# EAGLE board myschematic (EAGLE 4.15)
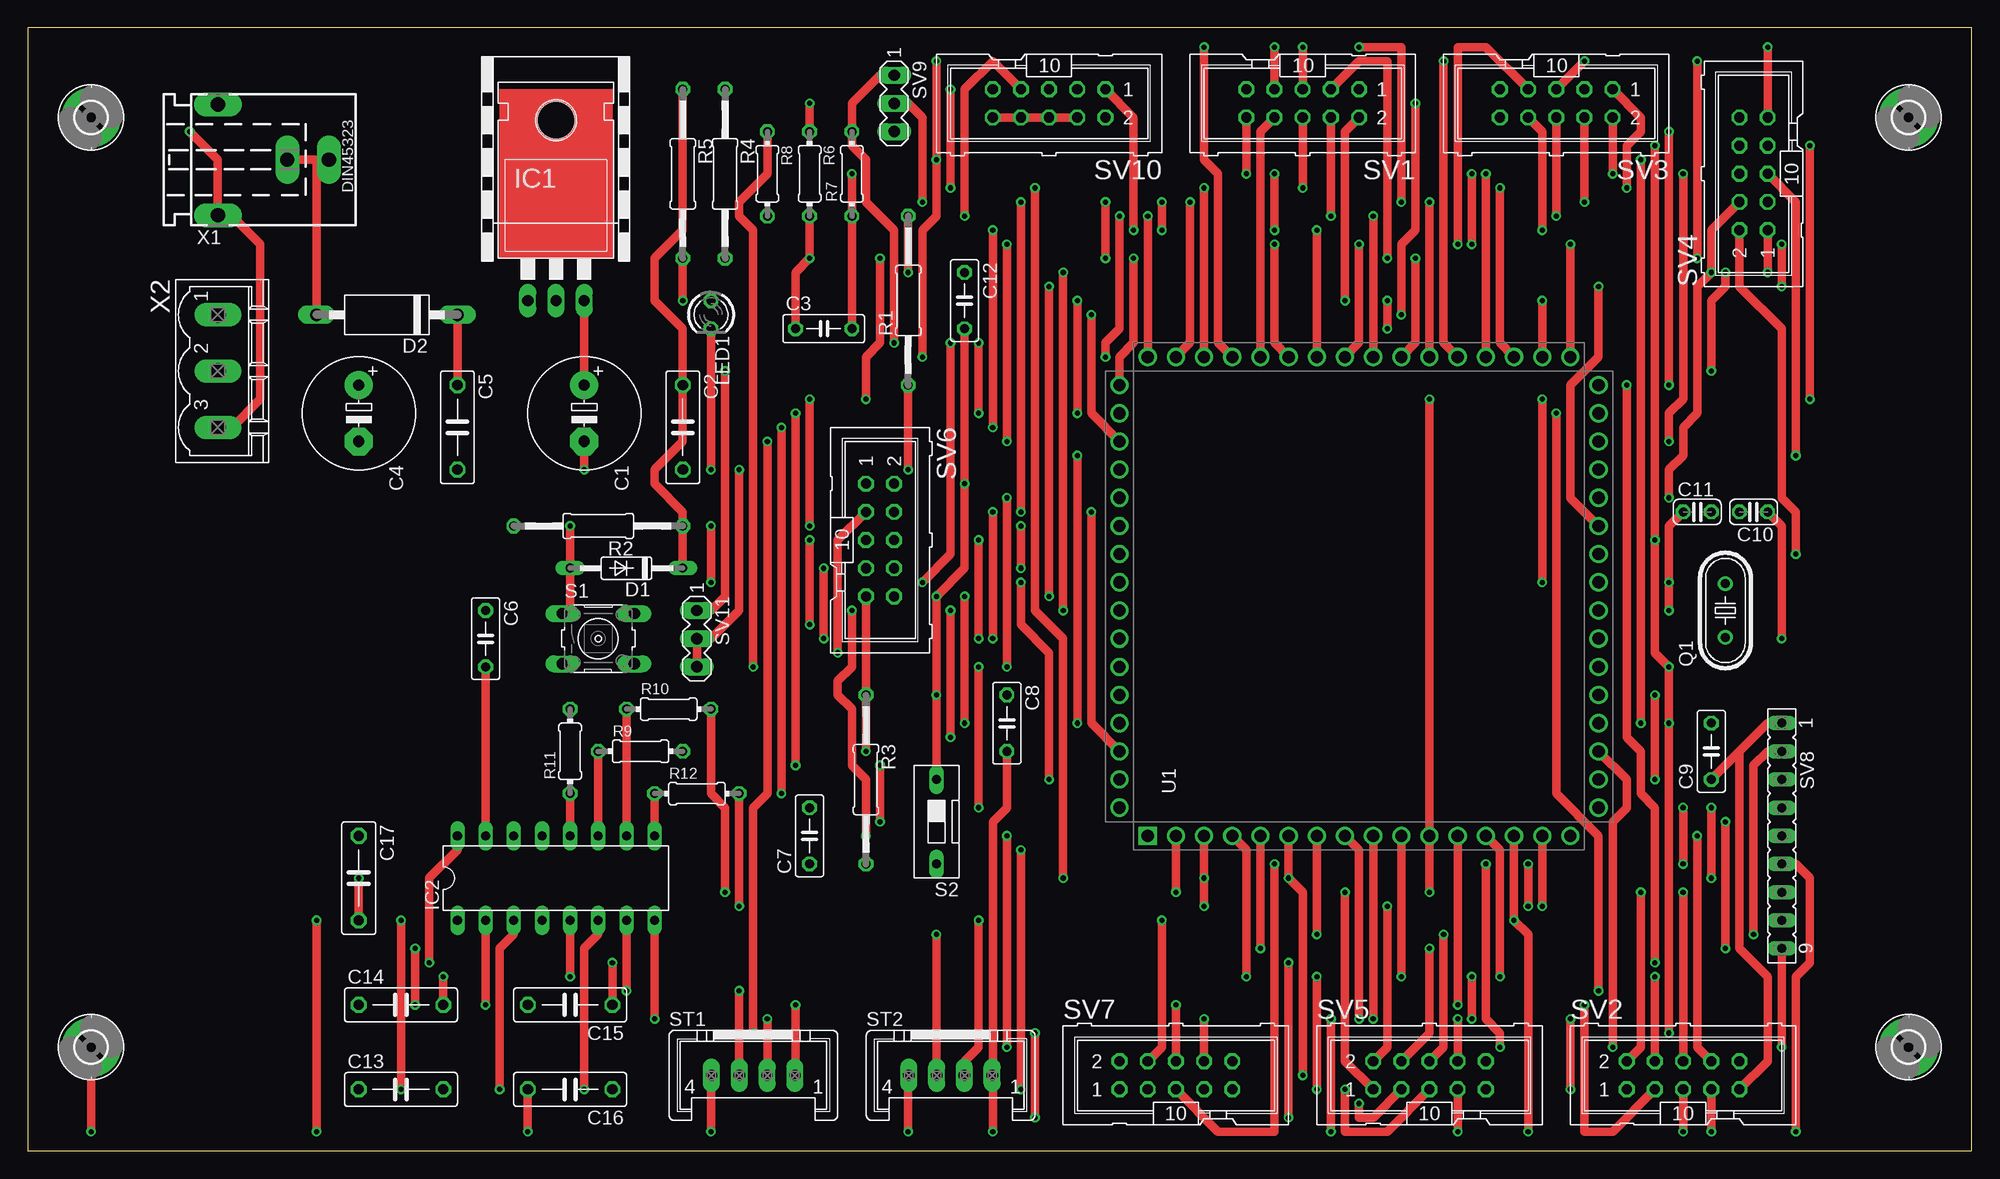
[diagram p0: board, top side]
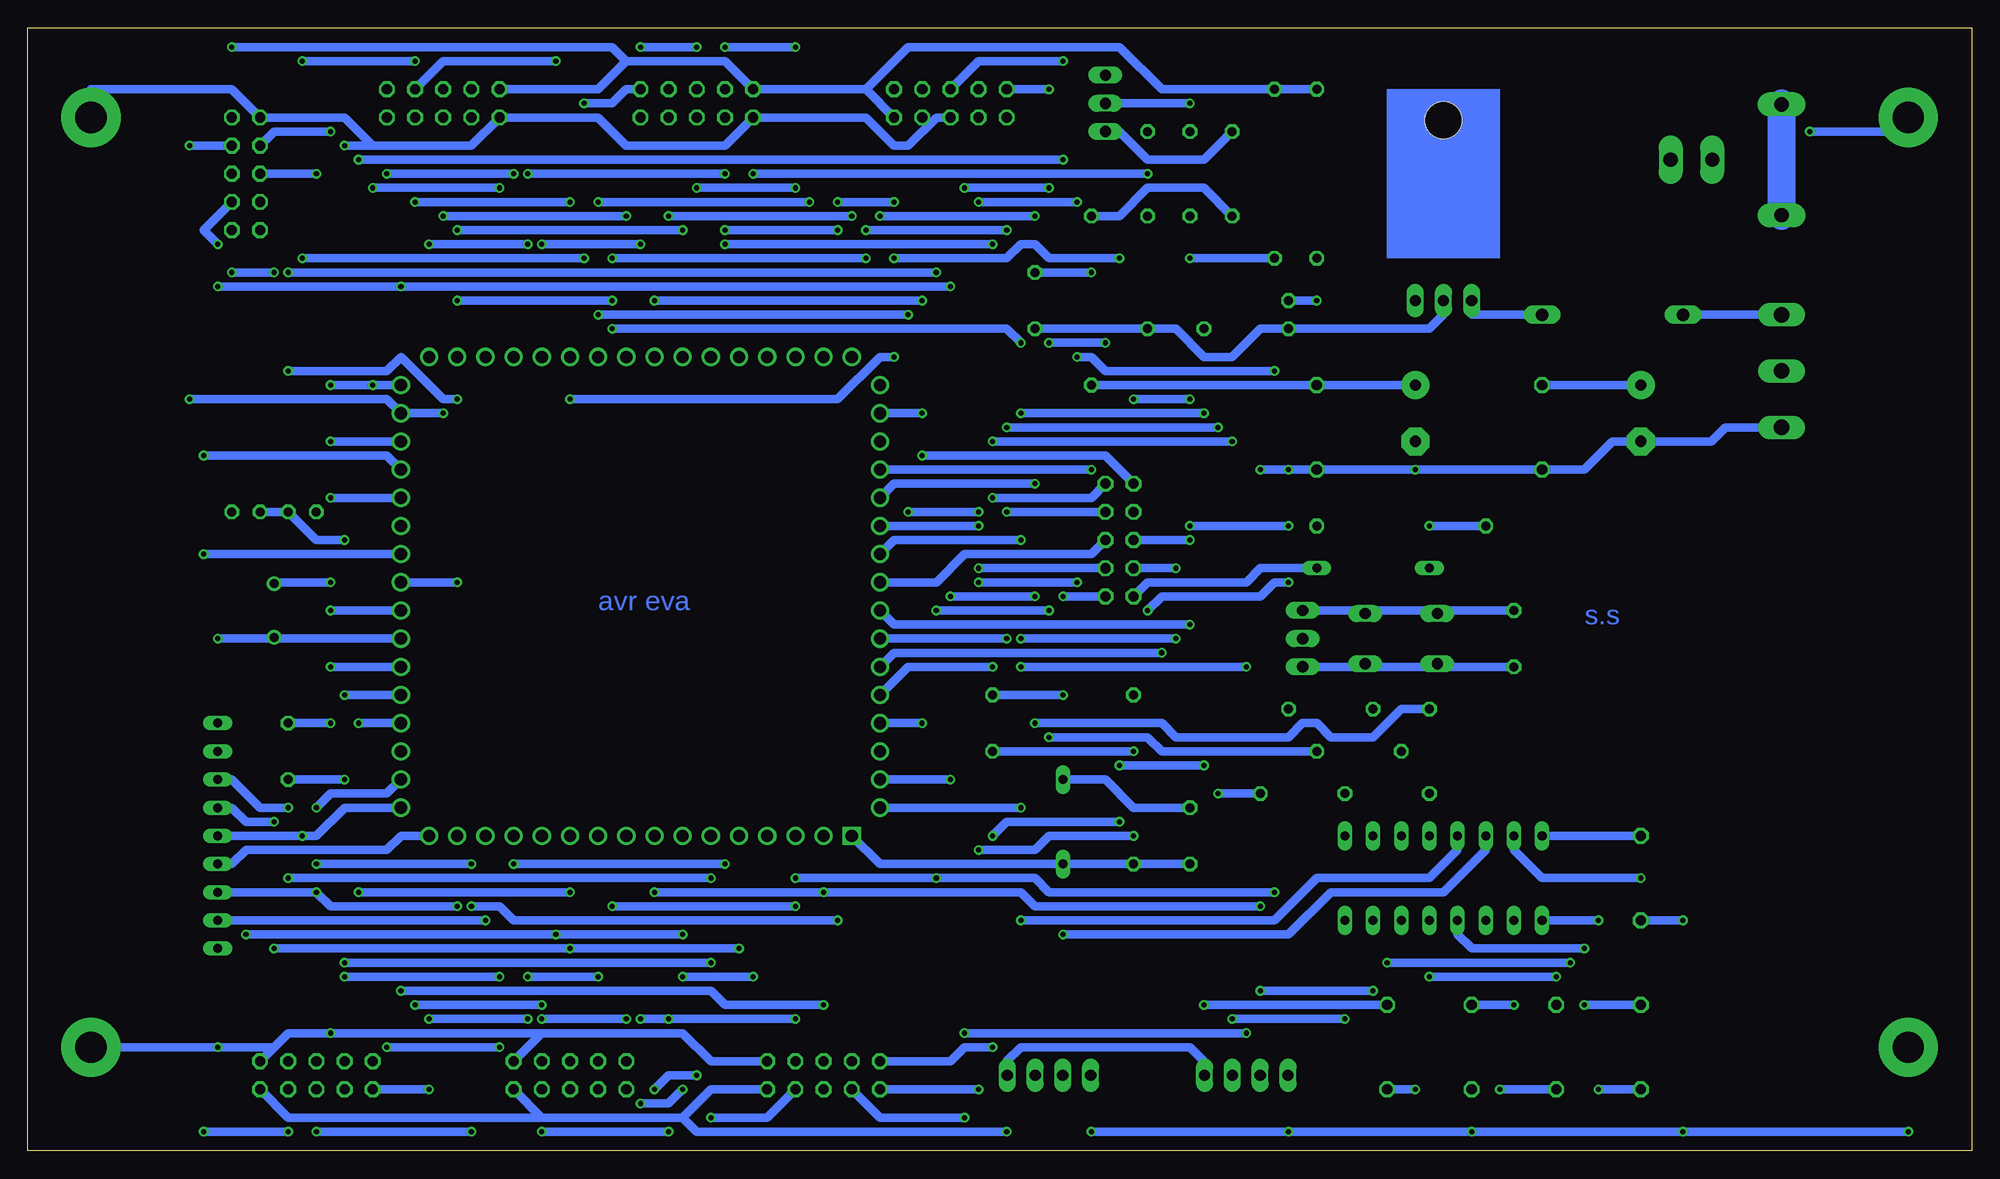
[diagram p1: board, bottom side, seen from below]

Size 175.24 x 101.27 mm. Coordinates in mm from the lower left corner, seen from the top.
Outline: 0,0 175.24,0 175.24,101.27 0,101.27 0,0
Copper layers (1*16): Top 0.035mm / dielectric 1.5mm / Bottom 0.035mm
Design rules "default": minimum track width 30mil, minimum drill 18mil, track to track 16mil, track to pad 16mil, pad to pad 16mil, via to via 16mil, smd to smd 8mil, copper to edge 20mil, drill to drill 8mil, minimum pad ring 10mil, minimum via ring 8mil, stop-mask expansion 1mil, vias tented up to drill 4mil, thermal gap 25mil
Net classes: 0 default: width 0.102 mm, drill 0.025 mm, clearance 0.025 mm
tRestrict: area 12.1,3 to 24.8,56.4; area 40,79.2 to 55.2,99.5; area 151.8,50 to 154.3,52.5; area 151.8,44.9 to 154.3,47.5; area 149.2,42.4 to 156.8,55.1; area 161.9,13.2 to 174.6,89.4; area 0.6,13.2 to 12.1,89.4; area 24.8,32.2 to 37.5,56.4
bRestrict: area 12.1,3 to 24.8,56.4; area 40,79.2 to 55.2,99.5; area 0.6,13.2 to 12.1,89.4; area 161.9,13.2 to 174.6,89.4; area 24.8,32.2 to 37.5,56.4
vRestrict: area 12.1,3 to 24.8,56.4; area 40,79.2 to 55.2,99.5; area 24.8,32.2 to 33.7,56.4

## Footprints (pad centres in the part's own frame; a part is rotated, then mirrored left to right if it is on the bottom)
E5-10,5 = drill 1.016 pad 2.54 round: + -2.54,0 | drill 1.016 pad 2.54 octagon: - 2.54,0
C075-032X103 = drill 0.914 octagon: 1 -3.81,0; 2 3.81,0
C050-025X075 = drill 0.813 octagon: 1 -2.54,0; 2 2.54,0
C025-024X044 = drill 0.813 octagon: 1 -1.27,0; 2 1.27,0
DO35-10 = drill 0.813 long: A 5.08,0; C -5.08,0
DO15-12 = drill 1.118 long: A 6.35,0; C -6.35,0
2,8-PAD = drill 2.8 pad 5.334 round: B2,8 0,0
78XXH = drill 1.016 long: GND 0,-5.08; IN -2.54,-5.08; OUT 2.54,-5.08 | hole 3.302: 0,11.176
DIL16 = drill 0.813 long: 1 -8.89,-3.81; 2 -6.35,-3.81; 3 -3.81,-3.81; 4 -1.27,-3.81; 5 1.27,-3.81; 6 3.81,-3.81; 7 6.35,-3.81; 8 8.89,-3.81; 9 8.89,3.81; 10 6.35,3.81; 11 3.81,3.81; 12 1.27,3.81; 13 -1.27,3.81; 14 -3.81,3.81; 15 -6.35,3.81; 16 -8.89,3.81
LED3MM = drill 0.813 octagon: A -1.27,0; K 1.27,0
HC49U-V = drill 0.813 round: 1 -2.413,0; 2 2.413,0
0207/15 = drill 0.813 octagon: 1 -7.62,0; 2 7.62,0
0204/7 = drill 0.813 octagon: 1 -3.81,0; 2 3.81,0
B3F-10XX = drill 1.016 long: 1 -3.251,2.261; 2 3.251,2.261; 3 -3.251,-2.261; 4 3.251,-2.261
DS-01 = drill 0.813 long: 1 0,-3.81; 2 0,3.81
MSF4 = drill 1.016 long: 1 3.759,-2.54; 2 1.245,-2.54; 3 -1.245,-2.54; 4 -3.759,-2.54
ML10 = drill 0.914 octagon: 1 -5.08,-1.27; 2 -5.08,1.27; 3 -2.54,-1.27; 4 -2.54,1.27; 5 0,-1.27; 6 0,1.27; 7 2.54,-1.27; 8 2.54,1.27; 9 5.08,-1.27; 10 5.08,1.27
FE09 = drill 0.813 long: 1 -10.16,0; 2 -7.62,0; 3 -5.08,0; 4 -2.54,0; 5 0,0; 6 2.54,0; 7 5.08,0; 8 7.62,0; 9 10.16,0
MA03-1 = drill 1.016 long: 1 -2.54,0; 2 0,0; 3 2.54,0
HEADER_SQR64_43 = drill 1.092 square: 1 -21.59,19.05 | drill 1.092 round: 2 -21.59,16.51; 3 -21.59,13.97; 4 -21.59,11.43; 5 -21.59,8.89; 6 -21.59,6.35; 7 -21.59,3.81; 8 -21.59,1.27; 9 -21.59,-1.27; 10 -21.59,-3.81; 11 -21.59,-6.35; 12 -21.59,-8.89; 13 -21.59,-11.43; 14 -21.59,-13.97; 15 -21.59,-16.51; 16 -21.59,-19.05; 17 -19.05,-21.59; 18 -16.51,-21.59; 19 -13.97,-21.59; 20 -11.43,-21.59; 21 -8.89,-21.59; 22 -6.35,-21.59; 23 -3.81,-21.59; 24 -1.27,-21.59; 25 1.27,-21.59; 26 3.81,-21.59; 27 6.35,-21.59; 28 8.89,-21.59; 29 11.43,-21.59; 30 13.97,-21.59; 31 16.51,-21.59; 32 19.05,-21.59; 33 21.59,-19.05; 34 21.59,-16.51; 35 21.59,-13.97; 36 21.59,-11.43; 37 21.59,-8.89; 38 21.59,-6.35; 39 21.59,-3.81; 40 21.59,-1.27; 41 21.59,1.27; 42 21.59,3.81; 43 21.59,6.35; 44 21.59,8.89; 45 21.59,11.43; 46 21.59,13.97; 47 21.59,16.51; 48 21.59,19.05; 49 19.05,21.59; 50 16.51,21.59; 51 13.97,21.59; 52 11.43,21.59; 53 8.89,21.59; 54 6.35,21.59; 55 3.81,21.59; 56 1.27,21.59; 57 -1.27,21.59; 58 -3.81,21.59; 59 -6.35,21.59; 60 -8.89,21.59; 61 -11.43,21.59; 62 -13.97,21.59; 63 -16.51,21.59; 64 -19.05,21.59
737992-5 = drill 1.3 pad 2.184 long: + 0,10; -1 5,0; -2 -5,0; K 0,6.25
MSTBV3 = drill 1.397 long: 1 -5.08,0; 2 0,0; 3 5.08,0

## Placement (x,y rotation side)
C1  [E5-10,5]  50.16,66.51 270 top
C2  [C075-032X103]  59.05,65.24 270 top
C3  [C050-025X075]  71.75,74.13 0 top
C4  [E5-10,5]  29.84,66.51 270 top
C5  [C075-032X103]  38.73,65.24 270 top
C6  [C050-025X075]  41.27,46.19 270 top
C7  [C050-025X075]  70.48,28.41 90 top
C8  [C050-025X075]  88.26,38.57 270 top
C9  [C050-025X075]  151.76,36.03 90 top
C10  [C025-024X044]  155.57,57.62 180 top
C11  [C025-024X044]  150.49,57.62 0 top
C12  [C050-025X075]  84.45,76.67 270 top
C13  [C075-032X103]  33.65,5.55 0 top
C14  [C075-032X103]  33.65,13.17 0 top
C15  [C075-032X103]  48.89,13.17 180 top
C16  [C075-032X103]  48.89,5.55 180 top
C17  [C075-032X103]  29.84,24.6 270 top
D1  1N4148  [DO35-10]  53.97,52.54 180 top
D2  1N5060GP  [DO15-12]  32.38,75.4 180 top
H1  MOUNT-PAD-ROUND2.8  [2,8-PAD]  5.71,93.18 0 top
H2  MOUNT-PAD-ROUND2.8  [2,8-PAD]  5.71,9.36 0 top
H3  MOUNT-PAD-ROUND2.8  [2,8-PAD]  169.54,9.36 0 top
H4  MOUNT-PAD-ROUND2.8  [2,8-PAD]  169.54,93.18 0 top
IC1  REG  [78XXH]  47.62,81.75 0 top
IC2  MAX232  [DIL16]  47.62,24.6 0 top
LED1  [LED3MM]  61.59,75.4 270 top
Q1  [HC49U-V]  153.03,48.73 90 top
R1  [0207/15]  79.37,76.67 90 top
R2  [0207/15]  51.43,56.35 180 top
R3  [0207/15]  75.56,33.49 270 top
R4  [0207/15]  62.86,88.1 270 top
R5  [0207/15]  59.05,88.1 270 top
R6  [0204/7]  70.48,88.1 270 top
R7  [0204/7]  74.29,88.1 90 top
R8  [0204/7]  66.67,88.1 270 top
R9  [0204/7]  55.24,36.03 0 top
R10  [0204/7]  57.78,39.84 0 top
R11  [0204/7]  48.89,36.03 90 top
R12  [0204/7]  60.32,32.22 0 top
S1  [B3F-10XX]  51.43,46.19 0 top
S2  [DS-01]  81.91,29.68 180 top
ST1  MSF4  [MSF4]  65.4,9.36 0 top
ST2  MSF4  [MSF4]  83.18,9.36 0 top
SV1  PORTA  [ML10]  114.93,94.45 180 top
SV2  PORTB  [ML10]  149.22,6.82 0 top
SV3  PORTC  [ML10]  137.79,94.45 180 top
SV4  PORTD  [ML10]  155.57,88.1 90 top
SV5  PORTE  [ML10]  126.36,6.82 0 top
SV6  PORTF  [ML10]  76.83,55.08 270 top
SV7  PORTG/T  [ML10]  103.5,6.82 0 top
SV8  OC  [FE09]  158.11,28.41 270 top
SV9  [MA03-1]  78.1,94.45 270 top
SV10  PROG  [ML10]  92.07,94.45 180 top
SV11  RESET  [MA03-1]  60.32,46.19 270 top
U1  ATMEGA128_SINGLE64_43  [HEADER_SQR64_43]  120.01,50 90 top
X1  [737992-5]  17.14,89.37 270 top
X2  MSTBV3  [MSTBV3]  17.14,70.32 270 top

## Library data of the parts
C1-C17 R1-R12 = rcl
D1 D2 = diode
H1-H4 = holes
IC1 = 78xx_with_heatsink
IC2 = maxim
LED1 = led
Q1 = crystal
S1 = switch-omron
S2 = switch-dil
ST1 ST2 = con-lumberg
SV1-SV7 SV10 = con-harting-ml
SV8 = con-lsta
SV9 SV11 = con-lstb
U1 = atmel_prototype_header
X1 = con-conrad
X2 = con-phoenix-508

## Nets
AGND: R7.2 SV9.1 U1.63
AL: D2.A X1.+ X1.K X2.1
AREF: R6.1 SV9.2 U1.62
AVCC: R8.1 SV9.3 U1.64
C1+: C13.1 IC2.1
C1-: C13.2 IC2.3
C2+: C14.1 IC2.4
C2-: C14.2 IC2.5
GND: C1.- C2.2 C3.2 C4.- C5.2 C6.2 C7.2 C8.1 C9.2 C10.2 C11.2 C12.2 C16.2 C17.2 H1.B2,8 H2.B2,8 H3.B2,8 H4.B2,8 IC1.GND IC2.15 LED1.K R7.1 S1.3 S1.4 S2.1 ST1.4 ST2.4 SV1.10 SV2.10 SV3.10 SV4.10 SV5.10 SV6.10 SV7.10 SV8.9 SV10.4 SV10.6 SV10.8 SV10.10 SV11.2 SV11.3 U1.22 U1.53 X1.-1 X2.3
LED: LED1.A R5.2
PA0: SV1.1 U1.51
PA1: SV1.2 U1.50
PA2: SV1.3 U1.49
PA3: SV1.4 U1.48
PA4: SV1.5 U1.47
PA5: SV1.6 U1.46
PA6: SV1.7 U1.45
PA7: SV1.8 U1.44
PB0: SV2.1 U1.10
PB1: SV2.2 SV10.7 U1.11
PB2: SV2.3 U1.12
PB3: SV2.4 U1.13
PB4: SV2.5 SV8.8 U1.14
PB5: SV2.6 SV8.7 U1.15
PB6: SV2.7 SV8.6 U1.16
PB7: SV2.8 SV8.5 U1.17
PC0: SV3.1 U1.35
PC1: SV3.2 U1.36
PC2: SV3.3 U1.37
PC3: SV3.4 U1.38
PC4: SV3.5 U1.39
PC5: SV3.6 U1.40
PC6: SV3.7 U1.41
PC7: SV3.8 U1.42
PD0: SV4.1 U1.25
PD1: SV4.2 U1.26
PD2: R11.2 SV4.3 U1.27
PD3: R9.2 SV4.4 U1.28
PD4: SV4.5 U1.29
PD5: SV4.6 U1.30
PD6: SV4.7 SV7.6 U1.31
PD7: SV4.8 SV7.7 U1.32
PE0: R12.2 SV5.1 SV10.1 U1.2
PE1: R10.2 SV5.2 SV10.9 U1.3
PE2: SV5.3 U1.4
PE3: SV5.4 SV8.4 U1.5
PE4: SV5.5 SV8.3 U1.6
PE5: SV5.6 SV8.2 U1.7
PE6: SV5.7 SV7.8 U1.8
PE7: SV5.8 U1.9
PEN: C7.1 R3.2 S2.2 U1.1
PF0: SV6.1 U1.61
PF1: SV6.2 U1.60
PF2: SV6.3 U1.59
PF3: SV6.4 U1.58
PF4: SV6.5 U1.57
PF5: SV6.6 U1.56
PF6: SV6.7 U1.55
PF7: SV6.8 U1.54
PG0: SV7.1 U1.33
PG1: SV7.2 U1.34
PG2: SV7.3 U1.43
PG3: SV7.4 U1.18
PG4: SV7.5 U1.19
R1IN: IC2.13 ST2.2
R1OUT: IC2.12 R11.1
R2IN: IC2.8 ST1.2
R20OUT: IC2.9 R12.1
RECT: C4.+ C5.1 D2.C IC1.IN
REF: C3.1 R4.2 R6.2
RESET: C6.1 D1.A R2.2 S1.1 S1.2 SV10.5 SV11.1 U1.20
T1IN: IC2.11 R9.1
T1OUT: IC2.14 ST2.3
T2IN: IC2.10 R10.1
T2OUT: IC2.7 ST1.3
V+: C15.2 IC2.2
V-: C16.1 IC2.6
VCC: C1.+ C2.1 C8.2 C9.1 C15.1 C17.1 D1.C IC1.OUT IC2.16 R1.1 R2.1 R3.1 R4.1 R5.1 ST1.1 ST2.1 SV1.9 SV2.9 SV3.9 SV4.9 SV5.9 SV6.9 SV7.9 SV8.1 SV10.2 U1.21 U1.52
VCCREF: C12.1 R1.2 R8.2
XTAL1: C11.1 Q1.2 U1.24
XTAL2: C10.1 Q1.1 U1.23

## Tracks (layer width: path | path; a pad name or v marks a point on that pad's centre or on a via)
AGND  (via drill 0.46)
  Top 0.762: SV9.1 76.83,96.99 74.29,94.45 R7.2 74.29,90.64 75.56,89.37 75.56,85.56 78.1,83.02 v78.1,72.86 | v92.07,33.49 92.07,44.92 89.53,47.46 v89.53,51.27 | v80.64,51.27 83.18,53.81 v83.18,72.86
  Bottom 0.762: v92.07,33.49 U1.63 | v89.53,51.27 v80.64,51.27 | v83.18,72.86 v78.1,72.86
AL
  Top 0.762: 26.03,89.37 X1.+ 27.3,89.37 | 26.03,89.37 X1.K | D2.A 26.03,89.37
  Bottom 0.762: X2.1 D2.A
AREF  (via drill 0.46)
  Top 0.762: v70.48,94.45 R6.1 | U1.62 95.88,38.57 v95.88,57.62 | v89.53,57.62 v89.53,85.56 | v80.64,85.56 80.64,93.18 79.37,94.45 SV9.2
  Bottom 0.762: SV9.2 v70.48,94.45 | v95.88,57.62 v89.53,57.62 | v89.53,85.56 v80.64,85.56
AVCC  (via drill 0.46)
  Top 0.762: v85.72,43.65 v85.72,30.95 | v65.4,43.65 65.4,83.02 64.13,84.29 64.13,85.56 66.67,88.1 R8.1
  Bottom 0.762: R8.1 69.21,89.37 74.29,89.37 76.83,91.91 SV9.3 | v85.72,30.95 U1.64 | v65.4,43.65 v85.72,43.65
C1+  (via drill 0.46)
  Top 0.762: v33.65,5.55 v33.65,20.79
  Bottom 0.762: v33.65,20.79 IC2.1 | C13.1 v33.65,5.55
C1-  (via drill 0.46)
  Top 0.762: v42.54,5.55 42.54,18.25 43.81,19.52 IC2.3
  Bottom 0.762: C13.2 v42.54,5.55
C2+  (via drill 0.46)
  Top 0.762: v34.92,13.17 v34.92,18.25
  Bottom 0.762: v34.92,18.25 45.08,18.25 46.35,19.52 IC2.4 | C14.1 v34.92,13.17
C2-  (via drill 0.46)
  Top 0.762: C14.2 v37.46,15.71 | v48.89,15.71 IC2.5
  Bottom 0.762: v37.46,15.71 v48.89,15.71
GND  (via drill 0.46)
  Top 0.762: v158.11,9.36 SV8.9 | SV10.10 SV10.8 SV10.6 SV10.4 | v146.68,90.64 v146.68,55.08 146.68,44.92 v147.95,43.65 v147.95,38.57 v147.95,10.63 | S2.1 v81.91,41.11 v81.91,50 84.45,52.54 v84.45,60.16 C12.2 | C3.2 R7.1 v74.29,88.1 | v45.08,1.74 C16.2 | v61.59,1.74 61.59,5.55 ST1.4 | v79.37,1.74 79.37,5.55 ST2.4 | v5.71,1.74 H2.B2,8 | C6.2 IC2.15 | v29.84,24.6 C17.2 | SV11.3 SV11.2 61.59,46.19 64.13,48.73 v64.13,61.43 | v50.16,61.43 C1.- | X1.-1 18.41,84.29 20.95,81.75 20.95,67.78 18.41,65.24 X2.3 | v14.6,91.91 17.14,89.37 X1.-1 | X1.-1 17.14,84.29 | v26.03,20.79 v26.03,1.74 | LED1.K v61.59,61.43 | SV1.10 v109.85,88.1
  Bottom 0.762: H3.B2,8 v158.11,9.36 153.03,9.36 | 128.9,10.63 SV5.10 | 128.9,10.63 116.2,10.63 113.66,8.09 SV7.10 | 153.03,9.36 151.76,10.63 v147.95,10.63 128.9,10.63 | 153.03,9.36 SV2.10 | C10.2 C11.2 149.22,55.08 v146.68,55.08 | v147.95,38.57 C9.2 | v147.95,43.65 U1.22 | SV10.6 93.34,93.18 95.88,90.64 97.15,90.64 99.69,93.18 SV1.10 112.39,90.64 121.28,90.64 123.82,93.18 SV3.10 135.25,90.64 144.14,90.64 | 144.14,90.64 146.68,93.18 SV4.10 156.84,95.72 169.54,95.72 H4.B2,8 | 144.14,90.64 v146.68,90.64 | C7.2 75.56,30.95 78.1,33.49 S2.1 | v81.91,41.11 C8.1 | v81.91,50 SV6.10 | C12.2 C3.2 71.75,74.13 69.21,71.59 66.67,71.59 64.13,74.13 LED1.K 48.89,74.13 47.62,75.4 IC1.GND | U1.53 97.15,60.16 v84.45,60.16 | v79.37,1.74 v61.59,1.74 v45.08,1.74 v26.03,1.74 v5.71,1.74 | C6.2 47.62,43.65 S1.3 48.89,43.65 53.97,43.65 S1.4 55.24,43.65 SV11.3 | v29.84,24.6 38.73,24.6 41.27,27.14 IC2.15 | X2.3 22.22,65.24 23.49,63.97 C4.- 32.38,63.97 34.92,61.43 C5.2 v50.16,61.43 C2.2 v61.59,61.43 v64.13,61.43 | v14.6,91.91 6.98,91.91 H1.B2,8 | C17.2 v26.03,20.79 | v109.85,88.1 v74.29,88.1
LED  (via drill 0.46)
  Top 0.762: v59.05,76.67 R5.2
  Bottom 0.762: v59.05,76.67 LED1.A
N$58
  Bottom 2.54: 17.14,84.29 17.14,94.45
PA0  (via drill 0.46)
  Top 0.762: v125.09,94.45 125.09,83.02 123.82,81.75 v123.82,75.4 | v95.88,75.4 95.88,66.51 U1.51
  Bottom 0.762: SV1.1 121.28,95.72 122.55,94.45 v125.09,94.45 | v95.88,75.4 v123.82,75.4
PA1  (via drill 0.46)
  Top 0.762: SV1.2 118.74,91.91 v118.74,76.67 | v94.61,66.51 v94.61,76.67
  Bottom 0.762: v94.61,76.67 v118.74,76.67 | v94.61,66.51 U1.50
PA2  (via drill 0.46)
  Top 0.762: SV1.3 120.01,98.26 122.55,98.26 v122.55,80.48 | v99.69,80.48 99.69,72.86 98.42,71.59 U1.49
  Bottom 0.762: v99.69,80.48 v122.55,80.48
PA3  (via drill 0.46)
  Top 0.762: v117.47,84.29 SV1.4 | U1.48 v100.96,84.29
  Bottom 0.762: v100.96,84.29 v117.47,84.29
PA4  (via drill 0.46)
  Top 0.762: v114.93,99.53 SV1.5 | v120.01,99.53 123.82,99.53 v123.82,85.56 | v104.77,85.56 104.77,72.86 U1.47
  Bottom 0.762: v120.01,99.53 v114.93,99.53 | v104.77,85.56 v123.82,85.56
PA5  (via drill 0.46)
  Top 0.762: v114.93,86.83 SV1.6 | U1.46 v106.04,86.83
  Bottom 0.762: v106.04,86.83 v114.93,86.83
PA6  (via drill 0.46)
  Top 0.762: v112.39,99.53 SV1.7 | v106.04,99.53 106.04,89.37 107.31,88.1 107.31,72.86 U1.45
  Bottom 0.762: v106.04,99.53 v112.39,99.53
PA7
  Top 0.762: SV1.8 111.12,91.91 U1.44
PB0  (via drill 0.46)
  Top 0.762: v139.06,11.9 v139.06,5.55 | v130.17,15.71 v130.17,11.9 | v123.82,15.71 U1.10
  Bottom 0.762: v139.06,5.55 SV2.1 | v130.17,11.9 v139.06,11.9 | v123.82,15.71 v130.17,15.71
PB1  (via drill 0.46)
  Top 0.762: SV2.2 145.41,9.36 v145.41,23.33 | v126.36,23.33 U1.11 v126.36,67.78 | SV10.7 86.99,98.26 84.45,95.72 v84.45,84.29 | v98.42,84.29 98.42,74.13 97.15,72.86 v97.15,71.59
  Bottom 0.762: v126.36,23.33 v145.41,23.33 | v98.42,84.29 v84.45,84.29 | v97.15,71.59 98.42,71.59 102.23,67.78 v126.36,67.78
PB2  (via drill 0.46)
  Top 0.762: SV2.3 142.87,1.74 140.33,1.74 v140.33,13.17 | v128.9,13.17 U1.12
  Bottom 0.762: v128.9,13.17 v140.33,13.17
PB3  (via drill 0.46)
  Top 0.762: v146.68,15.71 SV2.4 | v132.71,15.71 132.71,27.14 U1.13
  Bottom 0.762: v132.71,15.71 v146.68,15.71
PB4  (via drill 0.46)
  Top 0.762: U1.14 v133.98,20.79 135.25,19.52 v135.25,1.74 | v149.22,1.74 SV2.5
  Bottom 0.762: v133.98,20.79 SV8.8 | v135.25,1.74 v149.22,1.74
PB5  (via drill 0.46)
  Top 0.762: SV2.6 v149.22,23.33 | v136.52,22.06 U1.15
  Bottom 0.762: SV8.7 v149.22,23.33 147.95,22.06 v136.52,22.06
PB6  (via drill 0.46)
  Top 0.762: v151.76,1.74 SV2.7 | v159.38,1.74 159.38,15.71 160.65,16.98 160.65,24.6 159.38,25.87 SV8.6
  Bottom 0.762: U1.16 141.6,28.41 142.87,27.14 155.57,27.14 156.84,25.87 SV8.6 | v151.76,1.74 v159.38,1.74
PB7  (via drill 0.46)
  Top 0.762: SV2.8 150.49,9.36 v150.49,28.41
  Bottom 0.762: U1.17 146.68,30.95 149.22,28.41 v150.49,28.41 SV8.5
PC0  (via drill 0.46)
  Top 0.762: SV3.1 145.41,93.18 145.41,91.91 144.14,90.64 v144.14,86.83 | v132.71,86.83 132.71,72.86 U1.35
  Bottom 0.762: v132.71,86.83 v144.14,86.83
PC1  (via drill 0.46)
  Top 0.762: v142.87,88.1 SV3.2 | U1.36 v131.44,88.1
  Bottom 0.762: v131.44,88.1 v142.87,88.1
PC2  (via drill 0.46)
  Top 0.762: v127.63,98.26 127.63,72.86 U1.37
  Bottom 0.762: SV3.3 137.79,98.26 v127.63,98.26
PC3  (via drill 0.46)
  Top 0.762: v140.33,85.56 SV3.4 | U1.38 v126.36,85.56
  Bottom 0.762: v126.36,85.56 v140.33,85.56
PC4  (via drill 0.46)
  Top 0.762: U1.39 125.09,72.86 v125.09,80.48 | v150.49,80.48 v150.49,98.26 | v140.33,98.26 SV3.5
  Bottom 0.762: v125.09,80.48 v150.49,80.48 | v150.49,98.26 v140.33,98.26
PC5  (via drill 0.46)
  Top 0.762: v137.79,84.29 SV3.6 | U1.40 v121.28,84.29
  Bottom 0.762: v121.28,84.29 v137.79,84.29
PC6  (via drill 0.46)
  Top 0.762: SV3.7 131.44,99.53 128.9,99.53 v128.9,81.75 | v120.01,81.75 120.01,72.86 U1.41
  Bottom 0.762: v120.01,81.75 v128.9,81.75
PC7  (via drill 0.46)
  Top 0.762: SV3.8 136.52,91.91 v136.52,83.02 | U1.42 v116.2,83.02
  Bottom 0.762: v116.2,83.02 v136.52,83.02
PD0  (via drill 0.46)
  Top 0.762: v156.84,79.21 SV4.1 | v153.03,79.21 153.03,77.94 151.76,76.67 v151.76,70.32 | v136.52,51.27 v136.52,67.78
  Bottom 0.762: v153.03,79.21 v156.84,79.21 | v151.76,70.32 142.87,70.32 141.6,71.59 137.79,67.78 v136.52,67.78 | v136.52,51.27 U1.25
PD1  (via drill 0.46)
  Top 0.762: SV4.2 154.3,77.94 158.11,74.13 158.11,58.89 159.38,57.62 v159.38,53.81
  Bottom 0.762: U1.26 v159.38,53.81
PD2  (via drill 0.46)
  Top 0.762: v84.45,38.57 v84.45,50 | v92.07,50 v92.07,77.94 | v158.11,77.94 v158.11,81.75 | U1.27 139.06,58.89 139.06,69.05 141.6,71.59 v141.6,77.94
  Bottom 0.762: R11.2 51.43,39.84 53.97,37.3 57.78,37.3 59.05,38.57 60.32,38.57 61.59,37.3 71.75,37.3 73.02,38.57 v84.45,38.57 | v84.45,50 v92.07,50 | v158.11,77.94 v141.6,77.94 v92.07,77.94 | v158.11,81.75 159.38,83.02 SV4.3
PD3  (via drill 0.46)
  Top 0.762: v83.18,37.3 v83.18,48.73 | v93.34,48.73 v93.34,79.21 | SV4.4 151.76,83.02 v151.76,79.21 150.49,77.94 150.49,66.51 149.22,65.24 149.22,62.7 147.95,61.43 v147.95,58.89
  Bottom 0.762: R9.2 73.02,36.03 74.29,37.3 v83.18,37.3 | v83.18,48.73 v93.34,48.73 | v93.34,79.21 v151.76,79.21 | v147.95,58.89 U1.28
PD4  (via drill 0.46)
  Top 0.762: SV4.5 159.38,85.56 v159.38,62.7
  Bottom 0.762: v159.38,62.7 142.87,62.7 U1.29
PD5  (via drill 0.46)
  Top 0.762: v149.22,88.1 149.22,67.78 147.95,66.51 v147.95,63.97
  Bottom 0.762: v149.22,88.1 SV4.6 | U1.30 v147.95,63.97
PD6  (via drill 0.46)
  Top 0.762: v103.5,13.17 SV7.6 | v141.6,14.44 141.6,28.41 137.79,32.22 v137.79,66.51 | v160.65,90.64 v160.65,67.78
  Bottom 0.762: v103.5,13.17 112.39,13.17 113.66,14.44 v141.6,14.44 | v137.79,66.51 U1.31 142.87,67.78 v160.65,67.78 | v160.65,90.64 SV4.7
PD7  (via drill 0.46)
  Top 0.762: v113.66,3.01 v113.66,16.98 | v146.68,16.98 146.68,30.95 145.41,32.22 145.41,36.03 144.14,37.3 v144.14,69.05 | v147.95,69.05 v147.95,91.91
  Bottom 0.762: SV7.7 108.58,3.01 v113.66,3.01 | v113.66,16.98 v146.68,16.98 | U1.32 v144.14,69.05 v147.95,69.05 | SV4.8 153.03,91.91 v147.95,91.91
PE0  (via drill 0.46)
  Top 0.762: v64.13,22.06 R12.2 | v103.5,23.33 U1.2 | SV5.1 118.74,8.09 v118.74,23.33 | SV10.1 99.69,93.18 v99.69,83.02 | v86.99,65.24 v86.99,83.02 | v67.94,32.22 v67.94,65.24
  Bottom 0.762: v64.13,22.06 84.45,22.06 85.72,23.33 v103.5,23.33 v118.74,23.33 | v86.99,83.02 v99.69,83.02 | v67.94,65.24 v86.99,65.24 | R12.2 v67.94,32.22
PE1  (via drill 0.46)
  Top 0.762: v106.04,22.06 v106.04,24.6 U1.3 | v122.55,22.06 122.55,9.36 SV5.2 | R10.2 61.59,32.22 62.86,30.95 v62.86,23.33 | v83.18,86.83 v83.18,95.72 | v90.8,86.83 90.8,48.73 93.34,46.19 v93.34,24.6
  Bottom 0.762: v106.04,22.06 v122.55,22.06 | v62.86,23.33 83.18,23.33 84.45,24.6 v93.34,24.6 v106.04,24.6 | v83.18,95.72 SV10.9 | v90.8,86.83 v83.18,86.83
PE2  (via drill 0.46)
  Top 0.762: SV5.3 121.28,3.01 120.01,3.01 v120.01,4.28 | v116.2,5.55 v116.2,15.71 | v109.85,15.71 109.85,27.14 U1.4
  Bottom 0.762: v120.01,4.28 117.47,4.28 v116.2,5.55 | v116.2,15.71 v109.85,15.71
PE3  (via drill 0.46)
  Top 0.762: v153.03,18.25 v153.03,29.68 | v126.36,18.25 126.36,10.63 SV5.4 | v111.12,18.25 U1.5
  Bottom 0.762: v153.03,29.68 155.57,29.68 156.84,30.95 SV8.4 | v153.03,18.25 v126.36,18.25 v111.12,18.25
PE4  (via drill 0.46)
  Top 0.762: U1.6 v113.66,24.6 114.93,23.33 v114.93,6.82 | v151.76,24.6 v151.76,30.95 | SV5.5 122.55,1.74 118.74,1.74 v118.74,5.55
  Bottom 0.762: v113.66,24.6 v151.76,24.6 | v151.76,30.95 154.3,30.95 156.84,33.49 SV8.3 | v118.74,5.55 117.47,6.82 v114.93,6.82
PE5  (via drill 0.46)
  Top 0.762: v155.57,19.52 155.57,34.76 156.84,36.03 SV8.2 | v127.63,19.52 127.63,9.36 SV5.6 | v116.2,19.52 U1.7
  Bottom 0.762: v155.57,19.52 v127.63,19.52 v116.2,19.52
PE6  (via drill 0.46)
  Top 0.762: SV7.8 v106.04,11.9 | v120.01,11.9 120.01,27.14 U1.8 | v128.9,1.74 SV5.7 | v117.47,11.9 v117.47,1.74
  Bottom 0.762: v120.01,11.9 v117.47,11.9 v106.04,11.9 | v117.47,1.74 v128.9,1.74
PE7  (via drill 0.46)
  Top 0.762: v128.9,11.9 SV5.8 | v121.28,11.9 U1.9
  Bottom 0.762: v121.28,11.9 v128.9,11.9
PEN
  Bottom 0.762: C7.1 R3.2 S2.2 98.42,25.87 U1.1
PF0  (via drill 0.46)
  Top 0.762: v94.61,62.7 v94.61,38.57
  Bottom 0.762: SV6.1 78.1,62.7 v94.61,62.7 | v94.61,38.57 U1.61
PF1  (via drill 0.46)
  Top 0.762: v88.26,43.65 v88.26,58.89
  Bottom 0.762: SV6.2 79.37,58.89 v88.26,58.89 | v88.26,43.65 95.88,43.65 U1.60
PF2  (via drill 0.46)
  Top 0.762: SV6.3 73.02,55.08 v73.02,44.92
  Bottom 0.762: v73.02,44.92 97.15,44.92 U1.59
PF3  (via drill 0.46)
  Top 0.762: v86.99,57.62 v86.99,46.19
  Bottom 0.762: SV6.4 v86.99,57.62 | v86.99,46.19 U1.58
PF4  (via drill 0.46)
  Top 0.762: v70.48,47.46 v70.48,55.08
  Bottom 0.762: v70.48,55.08 SV6.5 | v70.48,47.46 97.15,47.46 U1.57
PF5
  Bottom 0.762: SV6.6 79.37,53.81 90.8,53.81 93.34,51.27 U1.56
PF6  (via drill 0.46)
  Top 0.762: v71.75,46.19 v71.75,52.54 | v85.72,46.19 v85.72,55.08
  Bottom 0.762: v71.75,52.54 SV6.7 | v71.75,46.19 v85.72,46.19 | v85.72,55.08 97.15,55.08 U1.55
PF7  (via drill 0.46)
  Top 0.762: v89.53,52.54 v89.53,56.35
  Bottom 0.762: SV6.8 v89.53,52.54 | v89.53,56.35 U1.54
PG0  (via drill 0.46)
  Top 0.762: v89.53,5.55 v89.53,27.14 | v75.56,28.41 75.56,33.49 74.29,34.76 74.29,39.84 73.02,41.11 73.02,42.38 74.29,43.65 v74.29,48.73 | v61.59,51.27 v61.59,56.35 | v70.48,56.35 v70.48,67.78 | v75.56,67.78 75.56,71.59 76.83,72.86 v76.83,80.48 | v97.15,80.48 v97.15,85.56 | v102.23,85.56 v102.23,83.02 | v112.39,83.02 v112.39,88.1 | v130.17,88.1 v130.17,81.75 | v139.06,81.75 U1.33
  Bottom 0.762: v89.53,5.55 SV7.1 | v89.53,27.14 84.45,27.14 83.18,28.41 v75.56,28.41 | v74.29,48.73 73.02,50 64.13,50 62.86,51.27 v61.59,51.27 | v61.59,56.35 v70.48,56.35 | v70.48,67.78 v75.56,67.78 | v76.83,80.48 83.18,80.48 84.45,81.75 85.72,81.75 86.99,80.48 v97.15,80.48 | v97.15,85.56 v102.23,85.56 | v102.23,83.02 v112.39,83.02 | v112.39,88.1 v130.17,88.1 | v130.17,81.75 v139.06,81.75
PG1  (via drill 0.46)
  Top 0.762: v88.26,9.36 v88.26,28.41 | v76.83,29.68 v76.83,34.76 | v69.21,34.76 v69.21,66.51 | v85.72,66.51 v85.72,72.86 | v122.55,74.13 v122.55,76.67 | v136.52,76.67 U1.34
  Bottom 0.762: SV7.2 92.07,8.09 90.8,9.36 v88.26,9.36 | v88.26,28.41 86.99,29.68 v76.83,29.68 | v76.83,34.76 v69.21,34.76 | v69.21,66.51 v85.72,66.51 | v85.72,72.86 86.99,74.13 v122.55,74.13 | v122.55,76.67 v136.52,76.67
PG2  (via drill 0.46)
  Top 0.762: v90.8,10.63 v90.8,3.01 | v65.4,10.63 65.4,30.95 66.67,32.22 v66.67,63.97 | v88.26,63.97 v88.26,81.75 | v112.39,81.75 112.39,72.86 U1.43
  Bottom 0.762: SV7.3 98.42,3.01 v90.8,3.01 | v65.4,10.63 v90.8,10.63 | v66.67,63.97 v88.26,63.97 | v88.26,81.75 v112.39,81.75
PG3  (via drill 0.46)
  Top 0.762: SV7.4 102.23,9.36 v102.23,20.79 | v135.25,22.06 v135.25,25.87 | v149.22,25.87 v149.22,30.95
  Bottom 0.762: v102.23,20.79 131.44,20.79 132.71,22.06 v135.25,22.06 | v135.25,25.87 v149.22,25.87 | v149.22,30.95 147.95,32.22 142.87,32.22 U1.18
PG4  (via drill 0.46)
  Top 0.762: SV7.5 107.31,1.74 112.39,1.74 v112.39,25.87 | v131.44,25.87 131.44,11.9 132.71,10.63 v132.71,9.36 | v142.87,9.36 142.87,29.68 144.14,30.95 144.14,33.49 U1.19
  Bottom 0.762: v112.39,25.87 v131.44,25.87 | v132.71,9.36 v142.87,9.36
R1IN  (via drill 0.46)
  Top 0.762: v85.72,20.79 85.72,9.36 84.45,8.09 ST2.2
  Bottom 0.762: v85.72,20.79 62.86,20.79 59.05,24.6 48.89,24.6 46.35,27.14 IC2.13
R1OUT
  Top 0.762: IC2.12 R11.1
R2IN  (via drill 0.46)
  Top 0.762: v66.67,11.9 66.67,8.09 ST1.2 | v56.51,11.9 IC2.8
  Bottom 0.762: v56.51,11.9 v66.67,11.9
R20OUT
  Top 0.762: IC2.9 R12.1
RECT
  Top 0.762: C5.1 D2.C
  Bottom 0.762: IC1.IN 45.08,75.4 D2.C | C4.+ C5.1
REF  (via drill 0.46)
  Top 0.762: R6.2 v70.48,80.48 69.21,79.21 C3.1
  Bottom 0.762: R4.2 v70.48,80.48
RESET  (via drill 0.46)
  Top 0.762: v48.89,56.35 D1.A 48.89,48.73 S1.1 | v81.91,98.26 v81.91,89.37 81.91,84.29 80.64,83.02 v80.64,71.59 | v62.86,70.32 62.86,50 61.59,48.73 SV11.1 | v145.41,89.37 v145.41,38.57
  Bottom 0.762: v48.89,56.35 R2.2 | C6.1 47.62,48.73 S1.1 48.89,48.73 53.97,48.73 S1.2 55.24,48.73 SV11.1 | SV10.5 89.53,98.26 v81.91,98.26 | v80.64,71.59 79.37,71.59 78.1,70.32 v62.86,70.32 | v145.41,38.57 U1.20 | v81.91,89.37 v145.41,89.37
T1IN
  Top 0.762: IC2.11 R9.1
T1OUT  (via drill 0.46)
  Top 0.762: v81.91,19.52 81.91,8.09 ST2.3
  Bottom 0.762: v81.91,19.52 61.59,19.52 57.78,23.33 47.62,23.33 43.81,27.14 IC2.14
T2IN
  Top 0.762: IC2.10 R10.1
T2OUT  (via drill 0.46)
  Top 0.762: v64.13,14.44 64.13,8.09 ST1.3 | v53.97,14.44 IC2.7
  Bottom 0.762: v53.97,14.44 v64.13,14.44
V+  (via drill 0.46)
  Top 0.762: v41.27,13.17 IC2.2
  Bottom 0.762: v41.27,13.17 C15.2
V-  (via drill 0.46)
  Top 0.762: v50.16,5.55 50.16,18.25 51.43,19.52 IC2.6
  Bottom 0.762: v50.16,5.55 C16.1
VCC  (via drill 0.46)
  Top 0.762: v69.21,13.17 69.21,8.09 ST1.1 | v36.19,16.98 36.19,24.6 38.73,27.14 IC2.16 | C15.1 v52.7,16.98 | 154.3,36.03 156.84,38.57 SV8.1 | 154.3,36.03 C9.1 | v146.68,33.49 v146.68,41.11 | 154.3,36.03 154.3,18.25 156.84,15.71 156.84,8.09 SV2.9 | v86.99,1.74 86.99,5.55 ST2.1 86.99,8.09 86.99,29.68 88.26,30.95 C8.2 | v156.84,99.53 SV4.9 | SV6.9 R3.1 v75.56,36.03 | C1.+ IC1.OUT | D1.C R2.1 59.05,57.62 56.51,60.16 56.51,61.43 59.05,63.97 C2.1 59.05,74.13 56.51,76.67 56.51,80.48 59.05,83.02 R5.1 | R1.1 v79.37,61.43
  Bottom 0.762: IC2.16 C17.1 | ST2.1 86.99,8.09 85.72,9.36 70.48,9.36 69.21,8.09 ST1.1 | v69.21,13.17 C15.1 | v52.7,16.98 v36.19,16.98 | v146.68,41.11 U1.21 | C9.1 v146.68,33.49 | 128.9,3.01 SV5.9 | 116.2,3.01 128.9,3.01 | 116.2,3.01 113.66,5.55 SV7.9 | SV2.9 151.76,3.01 128.9,3.01 | v86.99,1.74 114.93,1.74 116.2,3.01 | 99.69,95.72 SV1.9 112.39,98.26 121.28,98.26 | 99.69,95.72 95.88,99.53 76.83,99.53 73.02,95.72 R4.1 R5.1 | SV3.9 123.82,95.72 121.28,98.26 | 99.69,95.72 SV10.2 | v156.84,99.53 122.55,99.53 121.28,98.26 | v75.56,36.03 C8.2 | R1.1 C2.1 C1.+ | v79.37,61.43 U1.52 | SV6.9 74.29,51.27 65.4,51.27 64.13,52.54 D1.C
VCCREF  (via drill 0.46)
  Top 0.762: R1.2 v79.37,79.21
  Bottom 0.762: R1.2 76.83,84.29 74.29,86.83 69.21,86.83 R8.2 | v79.37,79.21 C12.1
XTAL1  (via drill 0.46)
  Top 0.762: C11.1 147.95,56.35 v147.95,51.27 v147.95,48.73
  Bottom 0.762: v147.95,51.27 153.03,51.27 Q1.2 | U1.24 v147.95,48.73
XTAL2  (via drill 0.46)
  Top 0.762: C10.1 158.11,56.35 v158.11,46.19
  Bottom 0.762: U1.23 153.03,46.19 | 153.03,46.19 v158.11,46.19 | 153.03,46.19 Q1.1
(copper drawn outside any net)
  shapes: Bottom area x1, Top area x1

## Text on the board
Bottom: avr eva | s.s